# Altium PCB PCB TOP.pcbdoc
Units mm, origin at the board's own origin, x right, y up, seen from the top; angles counter-clockwise.
Board outline 104.52 x 96.77 mm, 2 copper layers (Top Layer, Bottom Layer); 11 components, 32 nets, 48 pads, 0 vias.
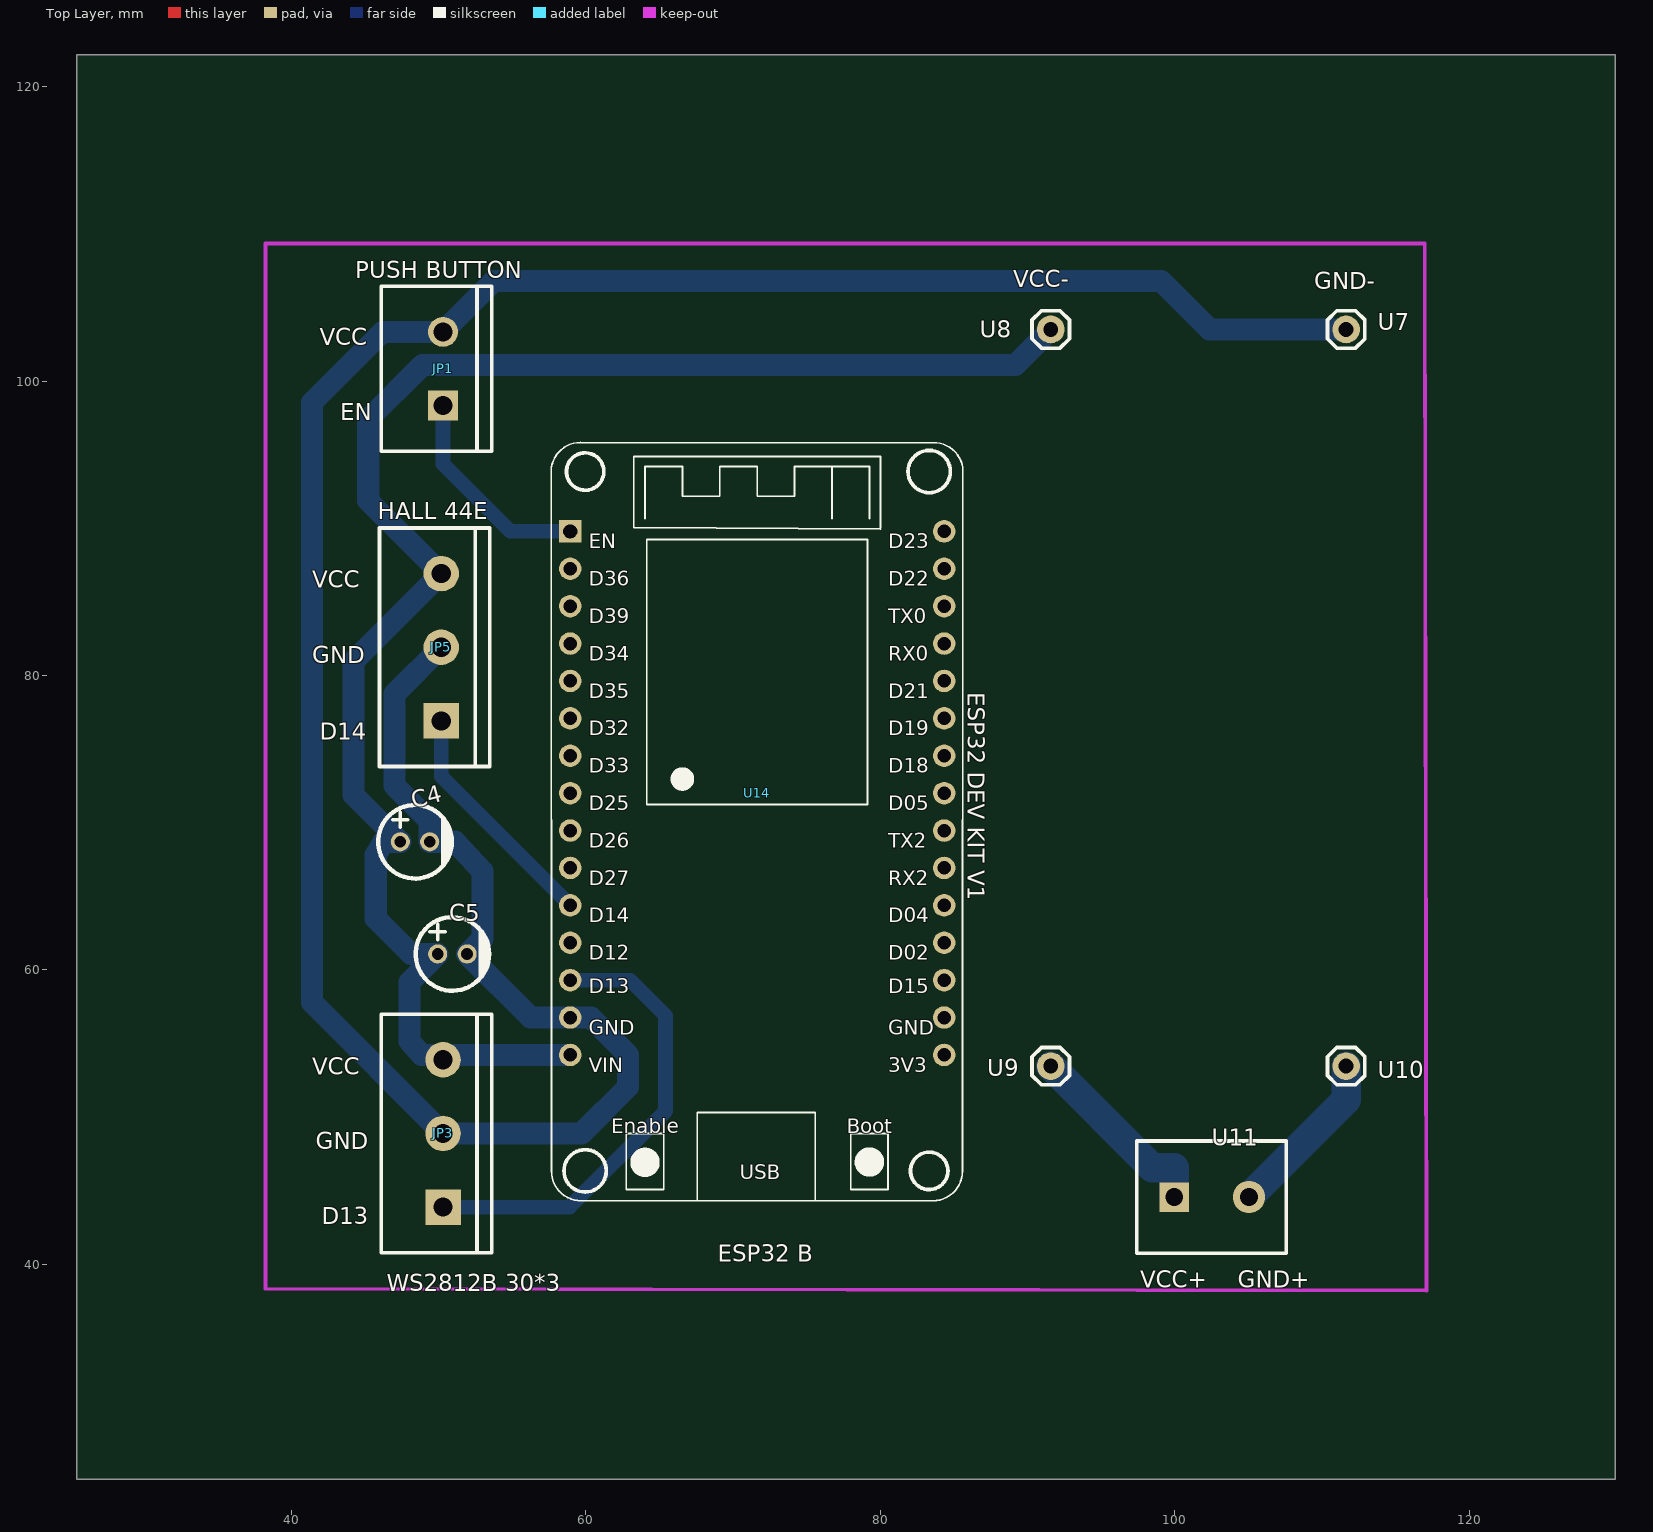
[diagram p0: Top Layer view]
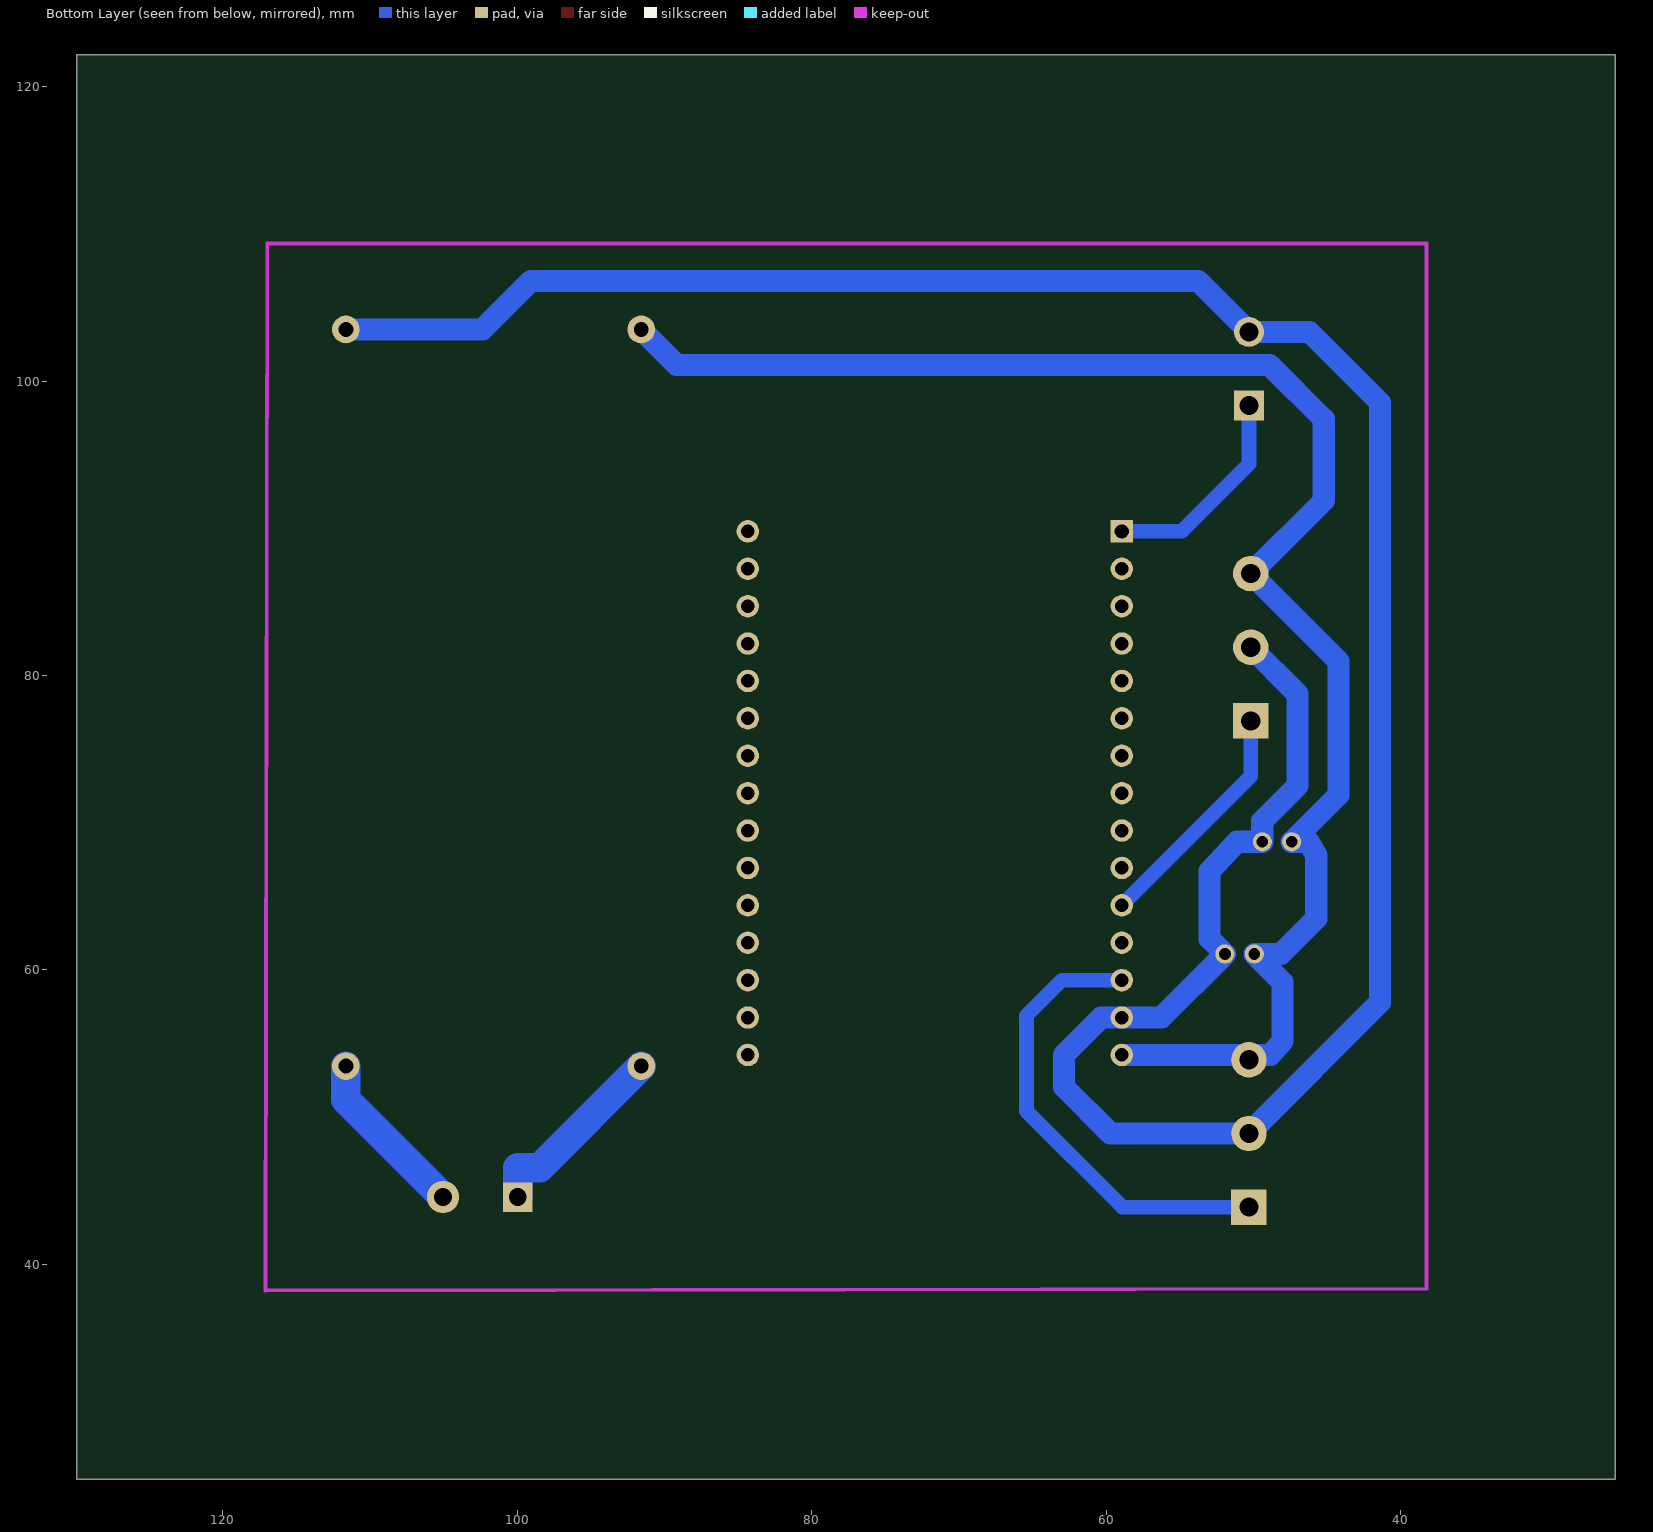
[diagram p1: Bottom Layer view, seen from below]

## Layer stack, top to bottom
Top Layer: signal copper (thickness not stored)
Dielectric: dielectric 0.32, FR-4, Dk 4.8
Bottom Layer: signal copper (thickness not stored)

## Board outline
129.921,25.4 25.4,25.4 25.4,122.174 129.921,122.174

## Components (designator, comment, footprint, x,y, rotation, side; value= is the part's Value field where it differs from the comment)
C4 "1uF" CAP-TH_BD5.0-P2.00-D0.8-FD 48.387,68.707 r0 top
C5 "1uF" CAP-TH_BD5.0-P2.00-D0.8-FD 50.927,61.087 r0 top
JP1 "PUSH BUTTON" SCREWTERMINAL-5MM-2 50.292,100.838 r90 top
JP3 "WS2812 B 144" SCREWTERMINAL-5MM-3 50.292,48.895 r90 top
JP5 "HALL EFFECT" SCREWTERMINAL-5MM-3 50.165,81.915 r90 top
U7 "GND -" "SINGLE HEADER PIN" 111.633,103.505 r0 top
U8 "GND -" "SINGLE HEADER PIN" 91.567,103.505 r0 top
U9 "GND -" "SINGLE HEADER PIN" 91.567,53.467 r0 top
U10 "GND -" "SINGLE HEADER PIN" 111.633,53.467 r0 top
U11 "12 V" 2-PIN-TERMINAL-CONNECTOR-FOOTPRINT 102.489,44.577 r0 top
U14 "ESP32 DEVKIT V1 DOIT" DOIT-ESP32-DEVKIT-V1 58.928,89.789 r0 top

## Footprints (in the part's own frame and the unit in brackets; to place one, negate y for a bottom-side part, rotate by r counter-clockwise, add the part's x,y. Pads: shape width x height; smd on the part's side, far side on the other; paste and mask are expansions set on the pad)
2-PIN-TERMINAL-CONNECTOR-FOOTPRINT [mm]
  round 2.2 hole 1.2: 1(2.54,0)
  rect 2x2 hole 1.2: 2(-2.54,0)
  silkscreen extent -5.08,-3.81 5.08,3.81
CAP-TH_BD5.0-P2.00-D0.8-FD [mm]
  round 1.3 hole 0.8: 1(-1,0) 2(1,0)
  silkscreen extent -2.5,-2.5 2.5,2.5
DOIT-ESP32-DEVKIT-V1 [mil]
  rect 60x60 hole 36 slot 37.8 at 0 deg: 1(-0.01,0.01)
  round 60 hole 36: 2(-0.01,-99.99) 3(-0.01,-199.99) 4(-0.01,-299.99) 5(-0.01,-399.99) 6(-0.01,-499.99) 7(-0.01,-599.99) 8(-0.01,-699.99) 9(-0.01,-799.99) 10(-0.01,-899.99) 11(-0.01,-999.99) 12(-0.01,-1099.99) 13(-0.01,-1199.99) 14(-0.01,-1299.99) 15(-0.01,-1399.99) 16(999.99,0.01) 17(999.99,-99.99) 18(999.99,-199.99) 19(999.99,-299.99) 20(999.99,-399.99) 21(999.99,-499.99) 22(999.99,-599.99) 23(999.99,-699.99) 24(999.99,-799.99) 25(999.99,-899.99) 26(999.99,-999.99) 27(999.99,-1099.99) 28(999.99,-1199.99) 29(999.99,-1299.99) 30(999.99,-1399.99)
  silkscreen extent -50,-1790 1050,238
SCREWTERMINAL-5MM-2 [mil]
  rect 80x80 hole 51.2: 1(-98.5,0)
  round 80 hole 51.2: 2(98.5,0)
  silkscreen extent -220,-130 220,165
SCREWTERMINAL-5MM-3 [mil]
  rect 95x95 hole 51.2: 1(-197,0)
  round 95 hole 51.2: 2(0,0) 3(197,0)
  silkscreen extent -319,-130 319,165
"SINGLE HEADER PIN" [mil]
  round 74 hole 40: 1(0,0)
  silkscreen extent -50,-50 50,50

## Nets (pads, with @x,y where several pads share a name; then routed paths per layer and width w, separated by ;. In a path a pad name is that pad's centre, name@x,y a point inside that pad or via, vN(x,y) a via of type N, cw(c..) or ccw(c..) an arc to the next point about the centre after c; other vN are vias at no path point)
JP3_1: JP3.1 U14.13 | length 31.8
  Bottom Layer w1: JP3.1 52.499,43.891 58.877,43.891 65.405,50.419 65.405,56.896 62.992,59.309 U14.13
JP5_1: JP5.1 U14.11 | length 16.2
  Bottom Layer w1: JP5.1 50.165,73.152 U14.11
JP5_2: C4.2 C5.2 JP1.2 JP3.2 JP5.2 U7.1 U14.14 | length 184.2
  Bottom Layer w1.5: JP5.2 46.99,78.74 46.99,72.517 49.388,70.119 C4.2 51.102,68.707 52.959,66.716 52.959,62.118 C5.2 ; C5.2 56.245,56.769 U14.14 60.325,56.769 62.865,54.229 62.865,52.07 59.69,48.895 JP3.2 41.402,57.785 41.402,98.552 46.19,103.34 JP1.2 53.759,106.807 99.06,106.807 102.362,103.505 U7.1
JP5_3: C4.1 C5.1 JP3.3 JP5.3 U8.1 U14.15 | length 113.6
  Bottom Layer w1: JP3.3 JP3.3@50.622,54.229
  Bottom Layer w1.5: U14.15 50.622,54.229 48.842,54.229 48.006,55.174 48.006,59.167 C5.1 48.133,61.087 45.72,63.5 45.72,67.798 46.251,68.707 C4.1 44.196,71.9 44.196,80.95 JP5.3 45.212,91.872 45.212,97.409 48.895,101.092 89.154,101.092 U8.1
U11_1: U10.1 U11.1 | length 11.6
  Bottom Layer w2: U11.1 111.633,51.181 U10.1
U11_2: U9.1 U11.2 | length 13.2
  Bottom Layer w2: U9.1 98.456,46.578 99.949,46.578 U11.2
U14_1: JP1.1 U14.1 | length 14.5
  Bottom Layer w1: JP1.1 50.292,96.319 50.292,94.361 54.864,89.789 57.165,89.789 U14.1
U14_2: U14.2
U14_3: U14.3
U14_4: U14.4
U14_5: U14.5
U14_6: U14.6
U14_7: U14.7
U14_8: U14.8
U14_9: U14.9
U14_10: U14.10
U14_12: U14.12
U14_16: U14.16
U14_17: U14.17
U14_18: U14.18
U14_19: U14.19
U14_20: U14.20
U14_21: U14.21
U14_22: U14.22
U14_23: U14.23
U14_24: U14.24
U14_25: U14.25
U14_26: U14.26
U14_27: U14.27
U14_28: U14.28
U14_29: U14.29
U14_30: U14.30

## Silkscreen, mask and mechanical layers (free items; w line width, h text height)
Top Overlay:
  text "PUSH BUTTON" at 44.323,106.998 h1.14
  text "VCC-" at 89.027,106.362 h1.14
  text "GND-" at 109.474,106.236 h1.14
  text "VCC" at 41.91,102.425 h1.14
  text "EN" at 43.307,97.346 h1.14
  text "HALL 44E" at 45.847,90.614 h1.14
  text "VCC" at 41.402,85.955 h1.14
  text "GND" at 41.402,80.835 h1.14
  text "ESP32 DEV KIT V1" at 85.915,78.867 h1.14 r270
  text "D14" at 41.91,75.629 h1.14
  text "VCC" at 41.402,52.895 h1.14
  text "GND" at 41.656,47.816 h1.14
  text "D13" at 42.037,42.735 h1.14
  text "ESP32 B" at 68.961,40.195 h1.14
  text "VCC+" at 97.663,38.417 h1.14
  text "GND+" at 104.267,38.417 h1.14
  text "WS2812B 30*3" at 46.482,38.163 h1.14

## Text inside footprints (layer, text, board x,y; h text height)
U14: Top Overlay "Enable" at 61.722,48.903 h1; Top Overlay "Boot" at 77.724,48.903 h1; Top Overlay "USB" at 70.428,45.799 h1; Top Overlay "EN" at 60.198,88.629 h1; Top Overlay "D36" at 60.198,86.089 h1; Top Overlay "D39" at 60.198,83.549 h1; Top Overlay "D34" at 60.198,81.009 h1; Top Overlay "D35" at 60.198,78.469 h1; Top Overlay "D32" at 60.198,75.929 h1; Top Overlay "D33" at 60.198,73.389 h1; Top Overlay "D13" at 60.198,58.403 h1; Top Overlay "D12" at 60.198,60.689 h1; Top Overlay "D14" at 60.198,63.229 h1; Top Overlay "D27" at 60.198,65.769 h1; Top Overlay "D26" at 60.198,68.309 h1; Top Overlay "D25" at 60.198,70.849 h1; Top Overlay "D05" at 80.518,70.849 h1; Top Overlay "TX2" at 80.518,68.309 h1; Top Overlay "RX2" at 80.518,65.769 h1; Top Overlay "D04" at 80.518,63.229 h1; Top Overlay "D02" at 80.518,60.689 h1; Top Overlay "D15" at 80.518,58.403 h1; Top Overlay "D18" at 80.518,73.389 h1; Top Overlay "D19" at 80.518,75.929 h1; Top Overlay "D21" at 80.518,78.469 h1; Top Overlay "RX0" at 80.518,81.009 h1; Top Overlay "TX0" at 80.518,83.549 h1; Top Overlay "D22" at 80.518,86.089 h1; Top Overlay "D23" at 80.518,88.629 h1; Top Overlay "GND" at 80.518,55.609 h1; Top Overlay "3V3" at 80.518,53.069 h1; Top Overlay "VIN" at 60.198,53.069 h1; Top Overlay "GND" at 60.198,55.609 h1